# Altium PCB D2.PcbDoc
Units mil, origin at the board's own origin, x right, y up, seen from the top; angles counter-clockwise.
Board outline 1500 x 1500 mil, 2 copper layers (Top Layer, Bottom Layer); 13 components, 10 nets, 40 pads, 0 vias.
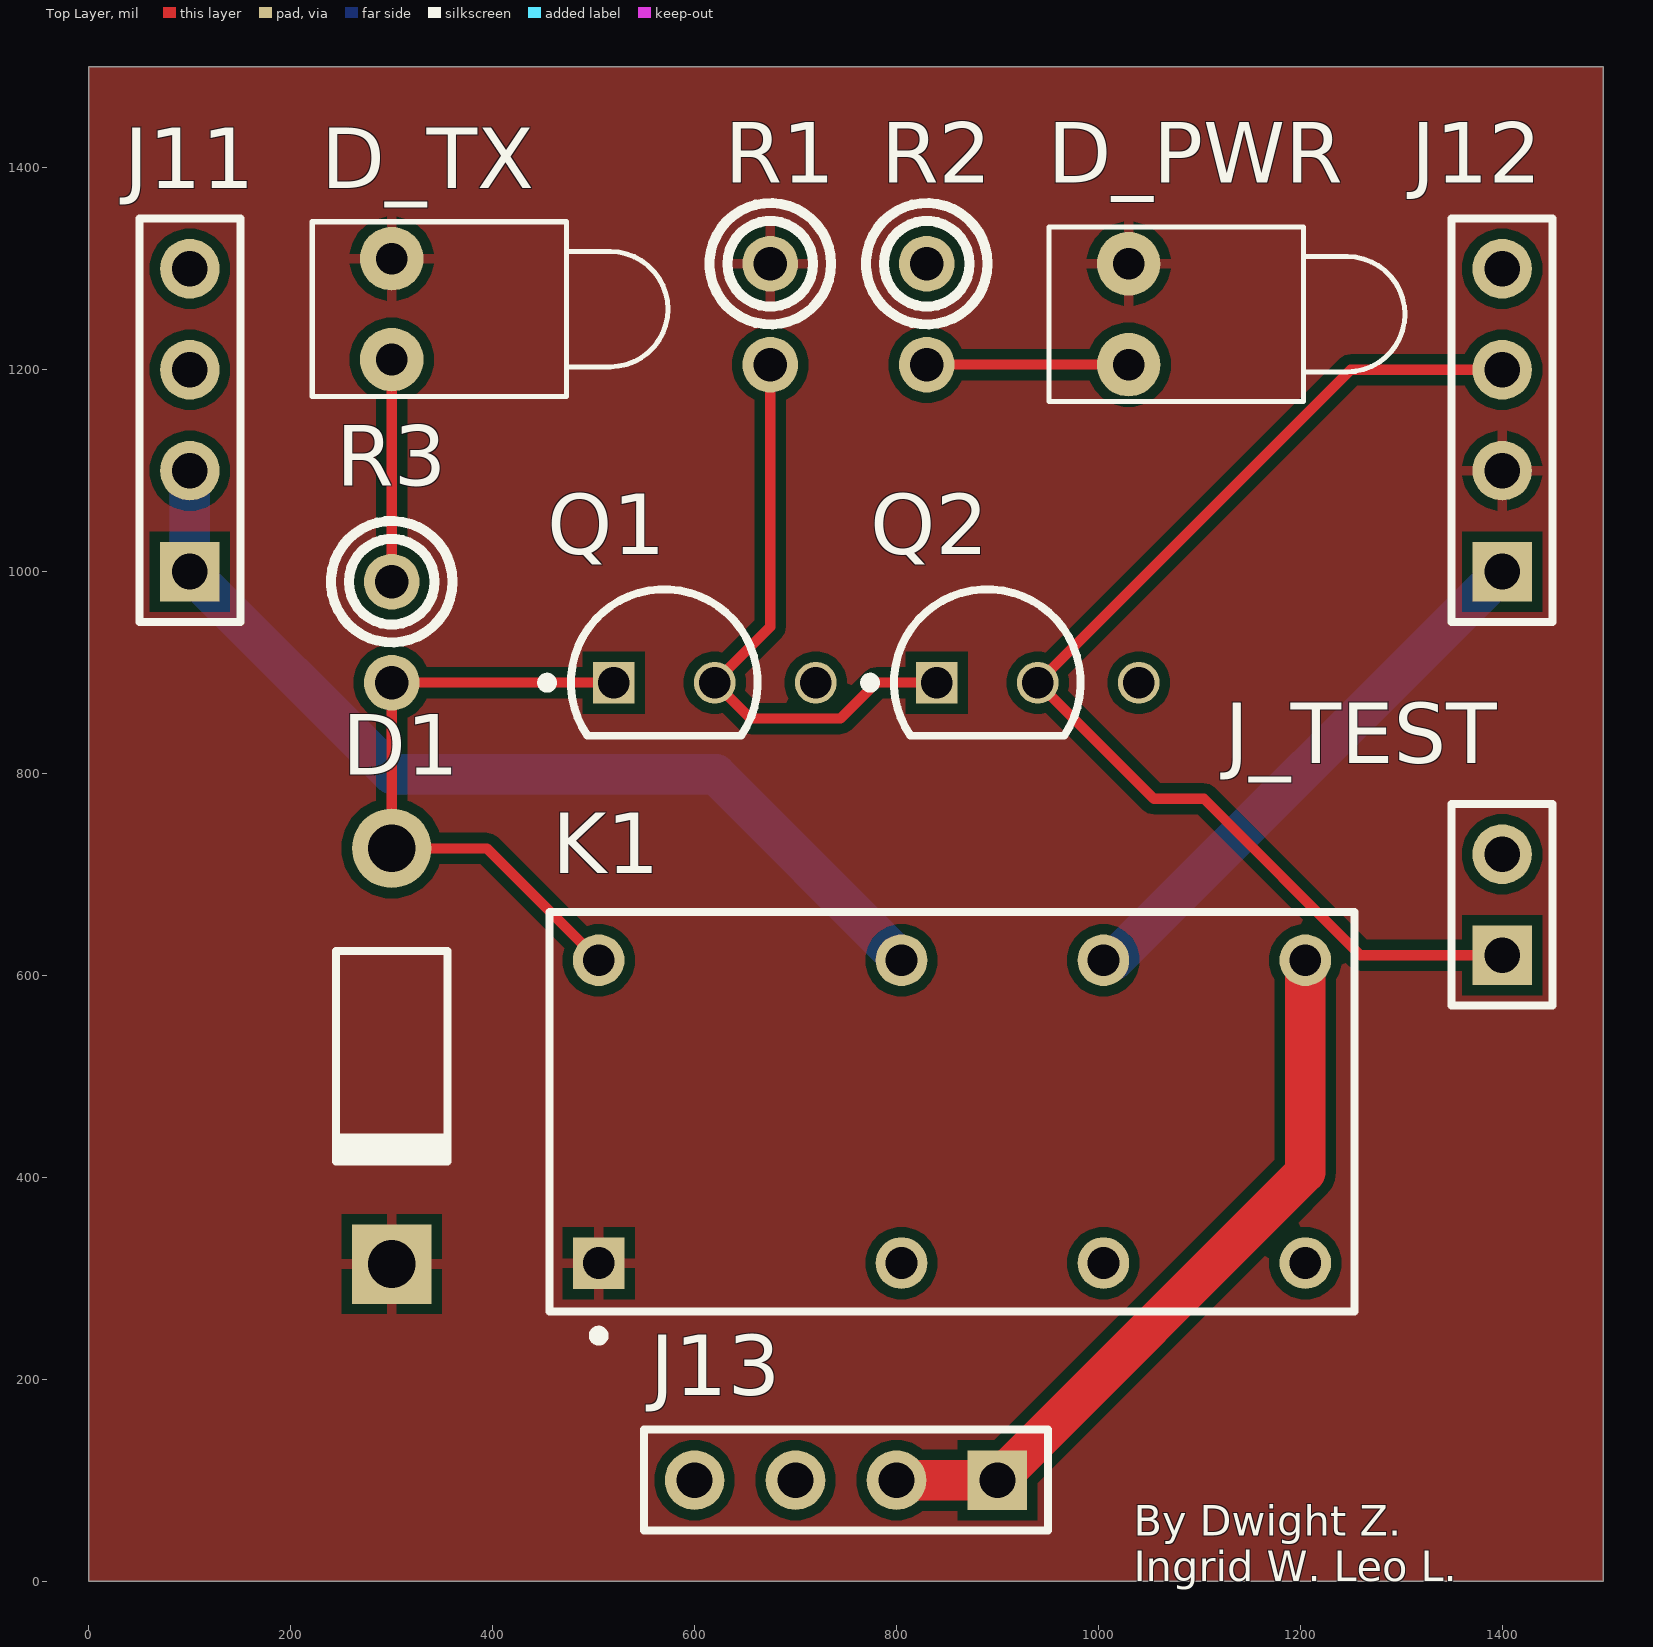
[diagram p0: Top Layer view]
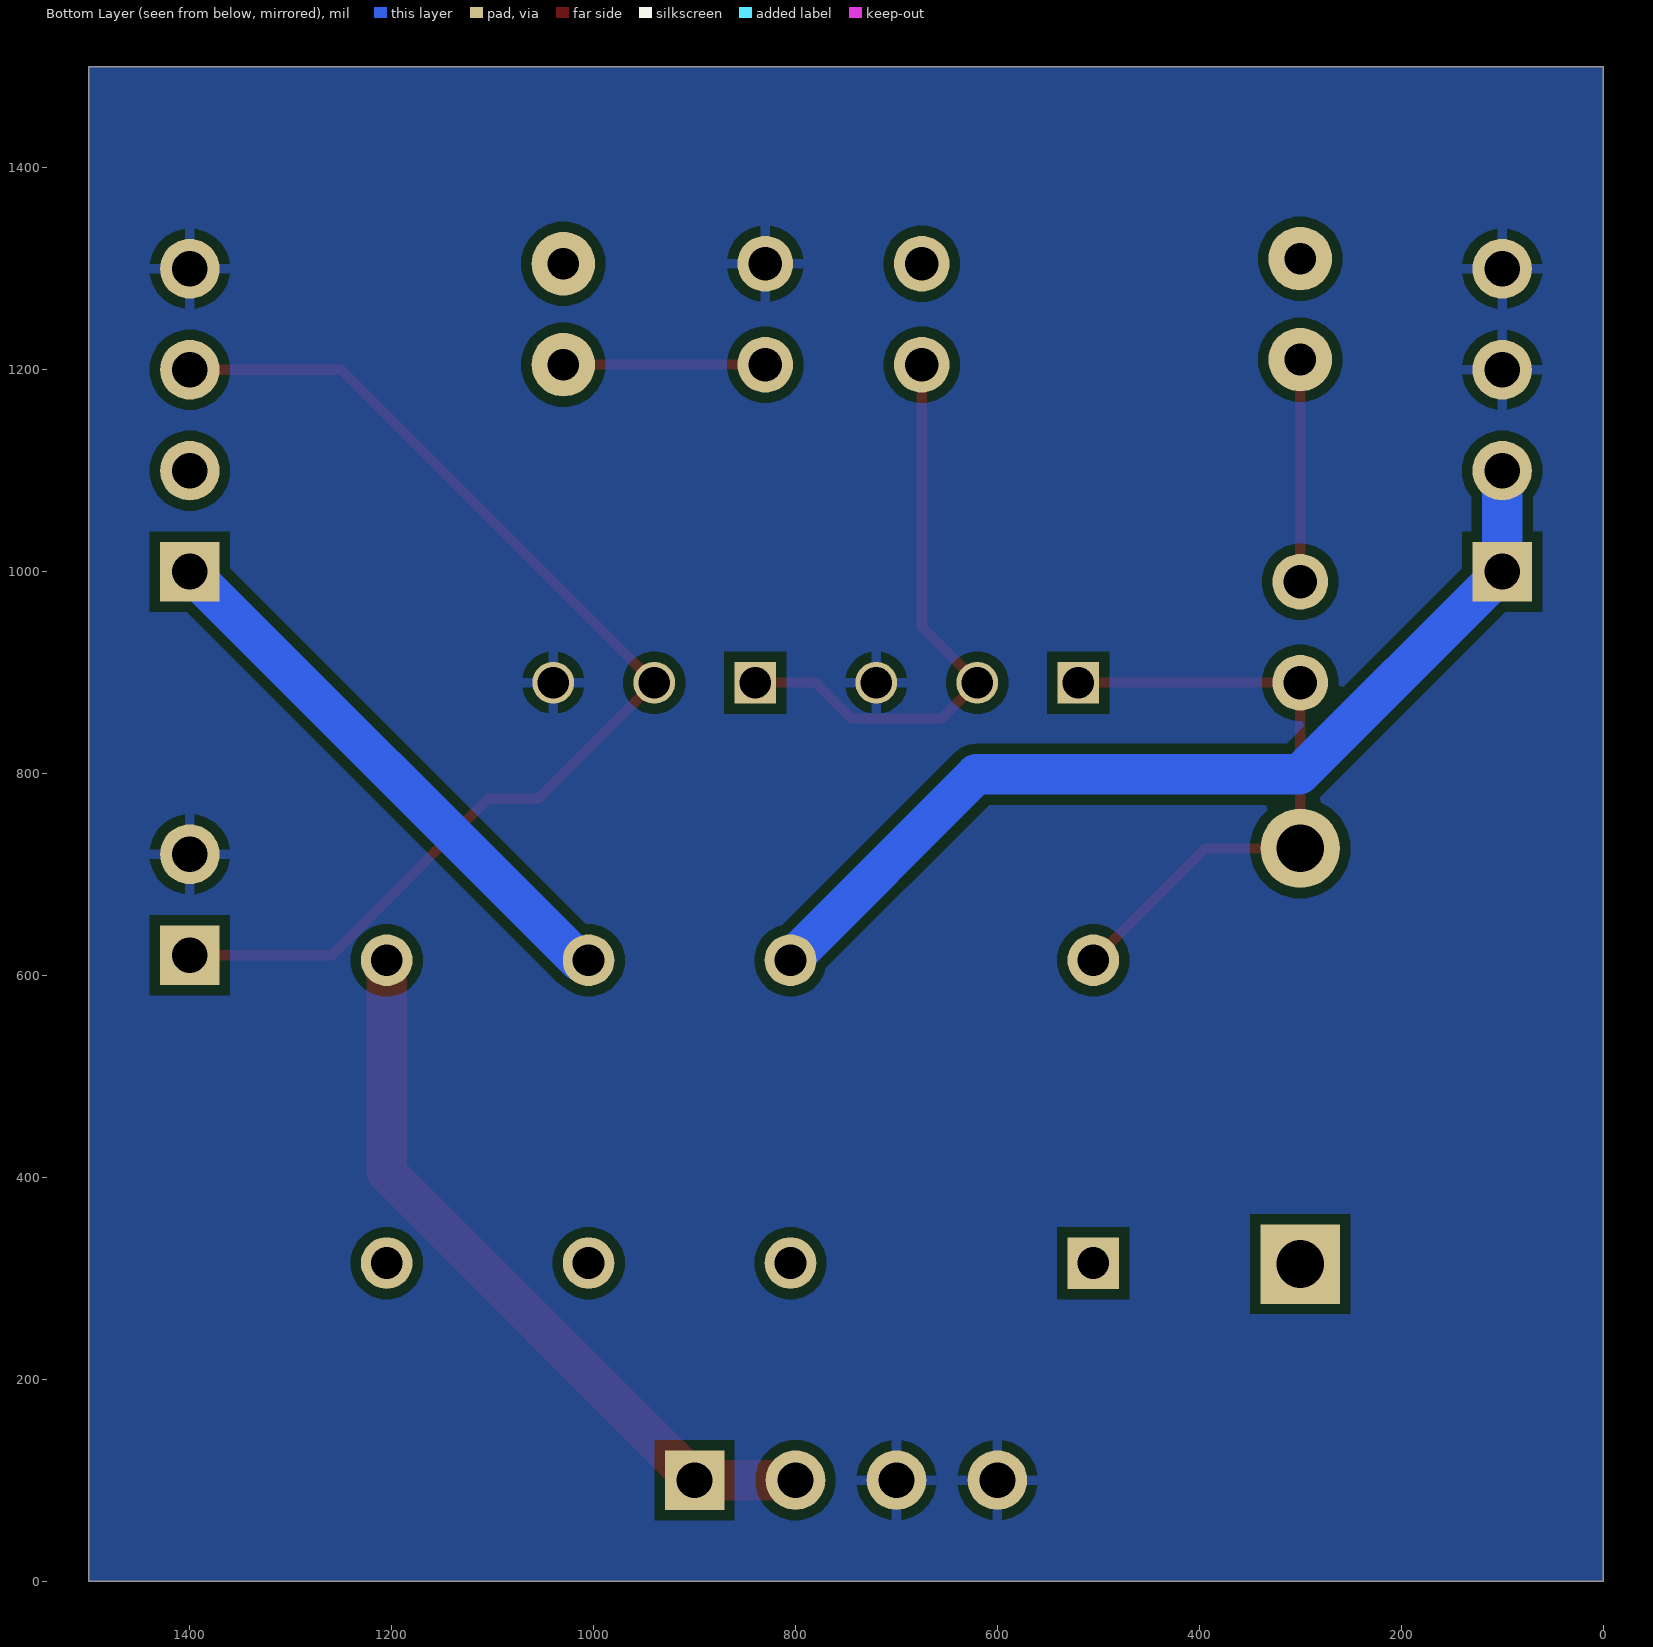
[diagram p1: Bottom Layer view, seen from below]

## Layer stack, top to bottom
Top Solder: solder mask 0.4, Solder Resist, Dk 3.5
Top Layer: signal copper 1.4
Dielectric 1: dielectric 12.6, FR-4, Dk 4.8
Bottom Layer: signal copper 1.4
Bottom Solder: solder mask 0.4, Solder Resist, Dk 3.5

## Board outline
0,0 0,1500 1500,1500 1500,0

## Design rules (kind name [scope] priority, off if disabled: settings)
Clearance [All] p1: gap=10 ignorepadtopadclearanceinfootprint=FALSE except(0: Arc-Hole Track-Hole SMDPad-Hole THPad-Hole Via-Hole Fill-Hole Poly-Hole Region-Hole Text-Hole)
HoleSize [All] p1: absolutevalues=TRUE maxlimit=900 minlimit=12 maxpercent=80.000 minpercent=20.000
MinimumSolderMaskSliver [All] p1: minsoldermaskwidth=1
PolygonConnect [All] p1: connectstyle=Relief reliefconductorwidth=10 reliefentries=4 polygonreliefangle="90 Angle" airgapwidth=10
RoutingVias [All] p1: holewidth=12 width=24 viastyle="Through Hole" minholewidth=12 minwidth=24 maxholewidth=100 maxwidth=200
SilkToSilkClearance [All] p1: silktosilkclearance=0
SilkToSolderMaskClearance [IsPad] p1: minsilkscreentomaskgap=1 clearancetoexposedcopper=TRUE
SolderMaskExpansion [All] p1: expansion=4 istentingtop=FALSE
Width [All] p1: maxlimit=200 minlimit=10 preferedwidth=10
26 further rules are at their usual default settings.

## Components (designator, comment, footprint, x,y, rotation, side; value= is the part's Value field where it differs from the comment)
D1 "Diode 1N4001" DO-41 300,520 r270 top
D_PWR "LED1" LED-1 1030,1255 r0 top
D_TX "LED1" LED-1 300,1260 r0 top
J11 "Header 4" HDR1X4 100,1000 r90 top
J12 "Header 4" HDR1X4 1400,1000 r90 top
J13 "Header 4" HDR1X4 900,100 r180 top
J_TEST "Header 2" HDR1X2 1400,620 r90 top
K1 "3-1462000-7" FP-3-1462000-7-MFG 855,465 r0 top
Q1 "BS170" ONSC-TO-92-3-29-11 570,890 r0 top
Q2 "BS170" ONSC-TO-92-3-29-11 890,890 r0 top
R1 "Res1" AXIAL-0.1-RES 675,1255 r270 top value=5.6K
R2 "Res1" AXIAL-0.1-RES 830,1255 r270 top value=220
R3 "Res1" AXIAL-0.1-RES 300,940 r270 top value=5.6K

## Footprints (in the part's own frame and the unit in brackets; to place one, negate y for a bottom-side part, rotate by r counter-clockwise, add the part's x,y. Pads: shape width x height; smd on the part's side, far side on the other; paste and mask are expansions set on the pad)
AXIAL-0.1-RES [mm] "Axial Device, Thru-Hole; 2 Leads; 0.3 in Pin Spacing"
  round 1.4 hole 0.85: 1(-1.27,0) 2(1.27,0)
  silkscreen extent -2.8,-1.53 0.26,1.53
DO-41 [mm] "Diode, Axial; Body 5.2 x 2.7 mm (LxDia. max), Lead Dia. 0.86 mm (max)"
  round 2 hole 1.2: 1(-5.23,0)
  rect 2x2 hole 1.2: 2(5.23,0)
  silkscreen extent -2.65,-1.41 2.75,1.4
FP-3-1462000-7-MFG [mm]
  rect 1.3x1.3 hole 0.8 paste-1000 mask+0: 1(-8.89,-3.81)
  round 1.3 hole 0.8 paste-1000 mask+0: 4(-1.27,-3.81) 6(3.81,-3.81) 8(8.89,-3.81) 9(8.89,3.81) 11(3.81,3.81) 13(-1.27,3.81) 16(-8.89,3.81)
  silkscreen extent -10.12,-5.76 10.12,5.02, body extent -10.23,-5.13 10.23,5.13, height 0.25
HDR1X2 [mm] "Connector; Header; 2 Position"
  rect 1.5x1.5 hole 0.9: 1(0,0)
  round 1.5 hole 0.9: 2(2.54,0)
  silkscreen extent -1.27,-1.27 3.81,1.27
HDR1X4 [mm] "Connector; Header; 4 Position"
  rect 1.5x1.5 hole 0.9: 1(0,0)
  round 1.5 hole 0.9: 2(2.54,0) 3(5.08,0) 4(7.62,0)
  silkscreen extent -1.27,-1.27 8.89,1.27
LED-1 [mm] "LED; 2 Leads"
  round 1.6 hole 0.8: 1(0,1.27) 2(0,-1.27)
  silkscreen extent -2,-2.2 6.95,2.2
ONSC-TO-92-3-29-11 [mm] "TO, 3-Leads, Body Dia 4.7mm, Pitch 1.27mm"
  rect 1.05x1.05 hole 0.8: 1(-1.27,0)
  round 1.05 hole 0.8: 2(1.27,0) 3(3.81,0)
  silkscreen extent -3.07,-1.34 2.35,2.35, body extent -2.35,-1.33 2.36,2.36, height 7.87

## Part data
D1: "1 Amp General Purpose Rectifier", Code_JEDEC=DO-204-AL, ComponentLink1Description="Manufacturer Link", ComponentLink1URL=http://www.fairchildsemi.com/, ComponentLink2Description=Datasheet, ComponentLink2URL=http://www.fairchildsemi.com/ds/1N%2F1N4001.pdf, DatasheetVersion=1998, LatestRevisionDate=17-Jul-2002, LatestRevisionNote="Re-released for DXP Platform.", PackageDescription="Diode, Axial; Body 5.2 x 2.7 mm (LxDia. max), Lead Dia. 0.86 mm (max)", PackageReference=DO-41, PackageVersion=Aug-1999, Published=8-Jun-2000, Publisher="Altium Limited"
D_PWR D_TX: "Typical RED GaAs LED", LatestRevisionDate=08-Jul-2005, LatestRevisionNote="Mech Layer 1 removed.", PackageDescription="LED; 2 Leads", PackageReference=LED-1, Published=8-Jun-2000, Publisher="Altium Limited"
J11 J12 J13: "Conn Header Vert 4POS 2.54MM", Color=Black, Manufacturer=Sullins, Manufacturer Part Number=PRPC004SAAN-RC, Package Quantity=1, Supplier Part Number 1=S1011EC-04-ND, Category=Connectors, ComponentLink1Description=https://datasheet.ciiva.com/741/xrxczzzsxxn-rc-st-11635-b-741241.pdf?src-supplier=Digi-Key, ComponentLink1URL=https://datasheet.ciiva.com/741/xrxczzzsxxn-rc-st-11635-b-741241.pdf?src-supplier=Digi-Key, Connector Type="Male Pin", Contact Mating Length=0.23inch, Contact Plating=Gold, Contact Type="Male Pin", LatestRevisionDate=17-Jul-2002, LatestRevisionNote="Re-released for DXP Platform.", Mount="Through Hole", Number of Positions=4, Number of Rows=1, Packaging=Bulk, Pitch=0.1inch, Pricing 1="1=0.15000, 10=0.14600, 25=0.10840, 50=0.09280, 100=0.08980, 250=0.07740, 500=0.07430 (USD)", Publisher="Altium Limited", RoHS=Yes, RoHS Compliant=Yes, Series=-, Stock 1=11511, Supplier 1=Digi-Key, Termination=Solder
J_TEST: "Conn Header .100\" Sngl Str 6POS", Color=Black, Manufacturer=Sullins, Manufacturer Part Number=PRPC006SAAN-RC, Package Quantity=1, Supplier Part Number 1=S1011EC-06-ND, Category=Connectors, ComponentLink1Description=https://datasheet.ciiva.com/741/xrxczzzsxxn-rc-st-11635-b-741239.pdf?src-supplier=Digi-Key, ComponentLink1URL=https://datasheet.ciiva.com/741/xrxczzzsxxn-rc-st-11635-b-741239.pdf?src-supplier=Digi-Key, Connector Type="Male Pin", Contact Mating Length=0.23inch, Contact Plating=Gold, Contact Type="Male Pin", LatestRevisionDate=17-Jul-2002, LatestRevisionNote="Re-released for DXP Platform.", Lead Free="Lead Free", Mount="Through Hole", Number of Positions=6, Number of Rows=1, Packaging=Bulk, Pitch=0.1inch, Pricing 1="1=0.19000, 10=0.17400, 25=0.14880, 50=0.13000, 100=0.12070, 250=0.10680, 500=0.10216 (USD)", Publisher="Altium Limited", RoHS=Yes, RoHS Compliant=Yes, Series=-, Stock 1=12450, Supplier 1=Digi-Key, Termination=Solder
K1: library part CMP-03396-000026-1, "RELAY TELECOM DPDT 2A 12VDC", Ambient Temperature Range High=+85°C, Ambient Temperature Range Low=-55°C, Coil Power=200mW, Coil Resistance=720Ω, Coil Voltage=12V, Current Rating=2A, Manufacturer="TE Connectivity", Temperature="-55°C to +85°C", Automotive=No, Category=Relay, Coil Type=Non-Latching, ComponentLink2Description=Datasheet, ComponentLink2URL=https://www.te.com/usa-en/product-3-1462000-7.html?te_bu=Cor&te_type=other&te_campaign=oct_glo_cor-oct-global-oth-prtnr-fy19-oct-octo-buy-bom_sma-298_2&elqCampaignId=35216, Device Class L1=Electromechanical, Device Class L2=Relays, Device Class L3="Signal Relays", Digikey Description="RELAY TELECOM DPDT 2A 12VDC", Height=10.9mm, Lead Free=Yes, Manufacturer Part Number=3-1462000-7, Mouser Description="Low Signal Relays - PCB 1.25AMP 2 FORM C 12V DPDT 2C/O", Number Of Contacts=2, Octopart=https://octopart.com/3-1462000-7-te+connectivity-40092230, Package=3-1462000-7, RoHS=TRUE, Standoff Height=0.2mm, Switching Current=2A, Temperature Range High=+85°C, Temperature Range Low=-55°C, Throw Configuration=DPDT
Q1 Q2: library part CMP-1058-00929-1, "Small Signal MOSFET, 500 mA, 60 V, N-Channel, 3-Pin TO-92, Bulk Box", Manufacturer="On Semiconductor", Package Type=TO-92, Channel Polarity="N Channel", ComponentLink1Description="Manufacturer URL", ComponentLink1URL=http://www.onsemi.com/, ComponentLink2Description=Datasheet, ComponentLink2URL=http://www.onsemi.com/pub_link/Collateral/BS170-D.PDF, ComponentLink3Description="Package Specification", ComponentLink3URL=http://www.onsemi.cn/pub_link/Collateral/2N6426-D.PDF, Configuration=Single, DatasheetVersion="Rev. 6", ID Max (A)=0.5, Mounting Technology="Through Hole", PackageDescription="3-Pin Transistor Outline, Body 4.825 x 3.685 mm, Pitch 1.27 mm", PackageReference=TO-92-3-29-11_AM_SL, PackageVersion="Rev. AM", Packing="Bulk Box", PartNumber=BS170, PD Max (W)=0.35, V(BR)DSS Min (V)=60, VGS Max (V)=20, VGS(th) Max (V)=3
R1 R3: library part "RES 5.6K OHM 5% 1/4W AXIAL", "Resistor", Manufacturer Part Number=CFR-25JB-52-5K6, Power Rating=1/4W, Tolerance=0.05, LatestRevisionDate=17-Jul-2002, LatestRevisionNote="Re-released for DXP Platform.", Published=8-Jun-2000, Publisher="Altium Limited"
R2: library part "RES 270 OHM 5% 1/4W AXIAL", "Resistor", Manufacturer Part Number=CFR-25JB-52-270R, Power Rating=1/4W, Tolerance=0.05, LatestRevisionDate=17-Jul-2002, LatestRevisionNote="Re-released for DXP Platform.", Published=8-Jun-2000, Publisher="Altium Limited"

## Nets (pads, with @x,y where several pads share a name; then routed paths per layer and width w, separated by ;. In a path a pad name is that pad's centre, name@x,y a point inside that pad or via, vN(x,y) a via of type N, cw(c..) or ccw(c..) an arc to the next point about the centre after c; other vN are vias at no path point)
+5V: D1.2 D_PWR.1 D_TX.1 J12.2 K1.1 R1.1
/TXEN: J12.3 J_TEST.1 Q2.2 | length 1160.2
  Top Layer w10: J_TEST.1 1259.56,620 1104.56,775 1055,775 Q2.2 1250,1200 J12.3
ANT: J11.1 J11.2 K1.13 | length 964.5
  Bottom Layer w40: J11.2 J11.1 300.82,799.18 620.82,799.18 K1.13
GND: J11.3 J11.4 J12.4 J13.3 J13.4 J_TEST.2 Q1.3 Q2.3 R2.1
NetD1_1: D1.1 K1.16 Q1.1 R3.2 | length 635
  Top Layer w10: K1.16 394.09,725.91 D1.1 R3.2 Q1.1
NetD_PWR_2: D_PWR.2 R2.2 | length 200
  Top Layer w10: R2.2 D_PWR.2
NetD_TX_2: D_TX.2 R3.1 | length 220
  Top Layer w10: R3.1 D_TX.2
PA_OUT: J13.1 J13.2 K1.9 | length 741.3
  Top Layer w40: J13.2 J13.1 1205,405 K1.9
RX_SIG: J12.1 K1.11 | length 554.5
  Bottom Layer w10: K1.11 K1.11@1015,615
  Bottom Layer w40: K1.11@1015,615 J12.1
TXEN: Q1.2 Q2.1 R1.2 | length 587.3
  Top Layer w10: R1.2 675,945.44 620,890.44 Q1.2 655.67,854.33 744.33,854.33 780,890 Q2.1
pads on no net: K1.4 K1.6 K1.8

## Polygon pours and split planes (outlines as drawn)
+5V on Top Layer "+5V_Pour" (solid, pour order 0): 0,1500 1500,1500 1500,0 0,0
GND on Bottom Layer "GND_Pour" (solid, pour order 1): 0,1500 1500,1500 1500,0 0,0

## Silkscreen, mask and mechanical layers (free items; w line width, h text height)
Top Overlay:
  text "By Dwight Z. / Ingrid W. Leo L." at 1035,0 h30
Mechanical 1:
  the board outline again, w10